# Altium PCB SensWear-V1R1-MainBoard.PcbDoc (part 1 of 3)
Units mm, origin at the board's own origin, x right, y up, seen from the top; angles counter-clockwise.
Board outline 50.5 x 8.5 mm, 4 copper layers (Top Layer, Layer 1, Layer 2, Bottom Layer), stack 0.148 mm thick; 73 components, 59 nets, 271 pads, 109 vias.
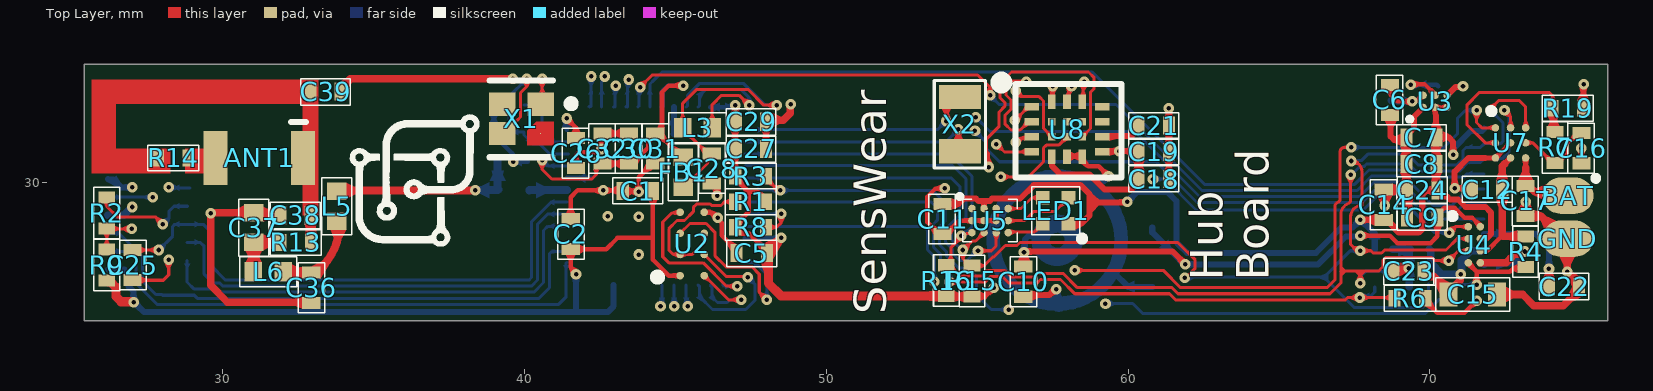
[diagram p0: Top Layer view]
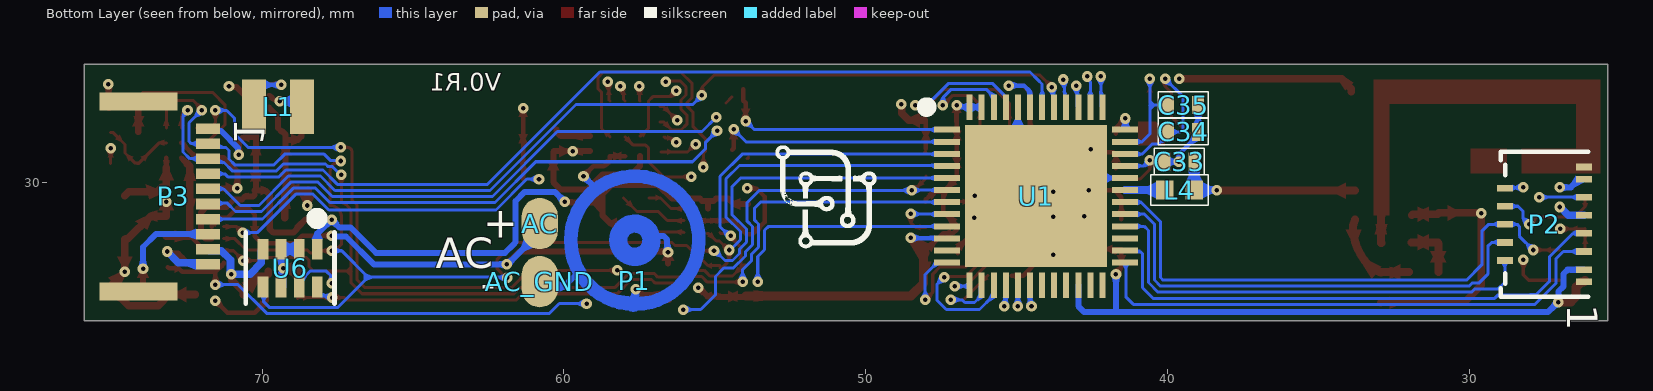
[diagram p1: Bottom Layer view, seen from below]
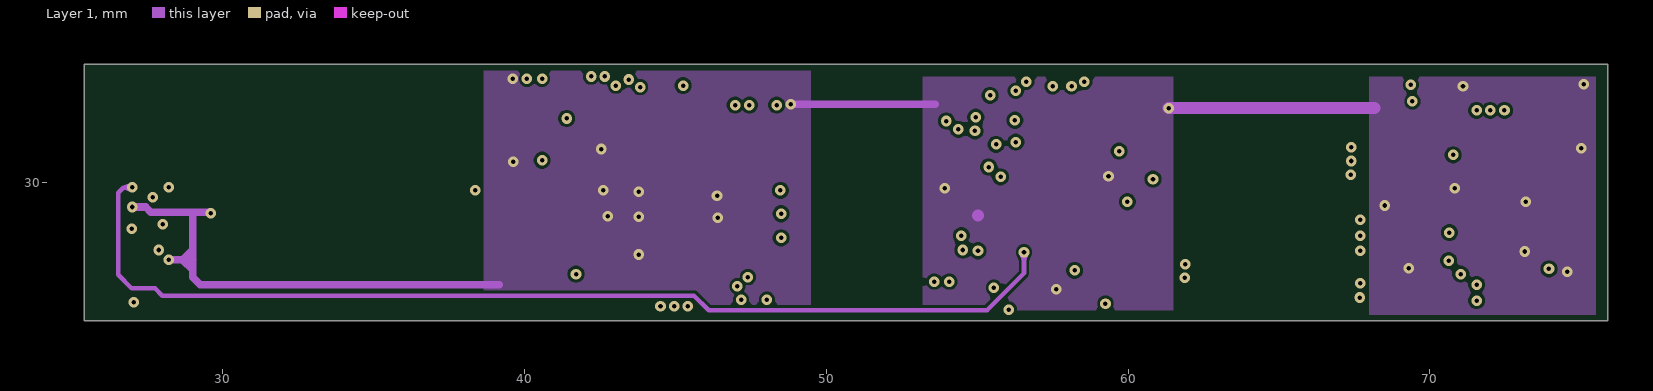
[diagram p2: Layer 1]
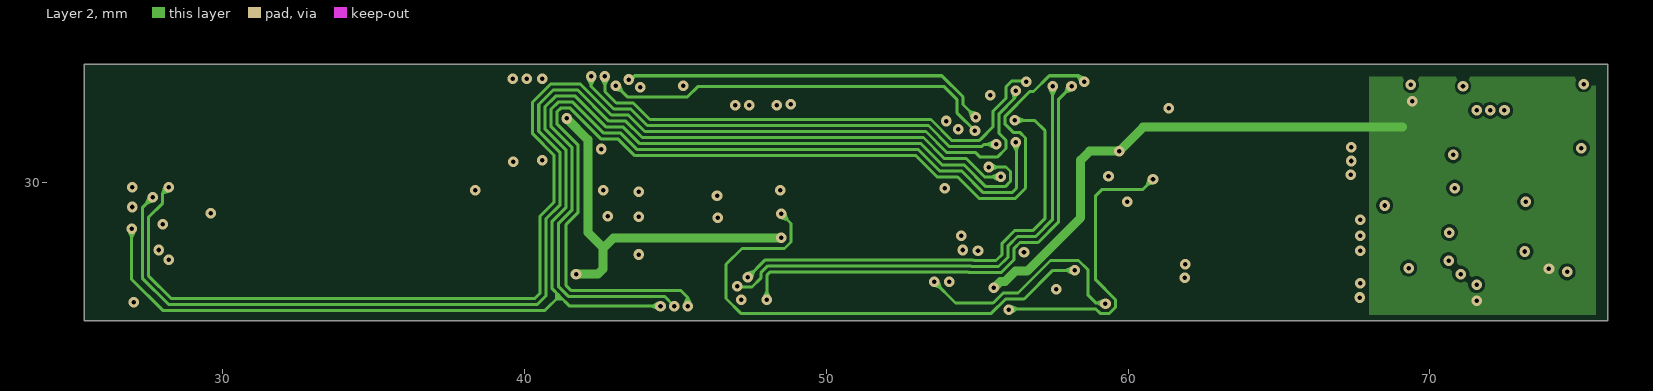
[diagram p3: Layer 2]
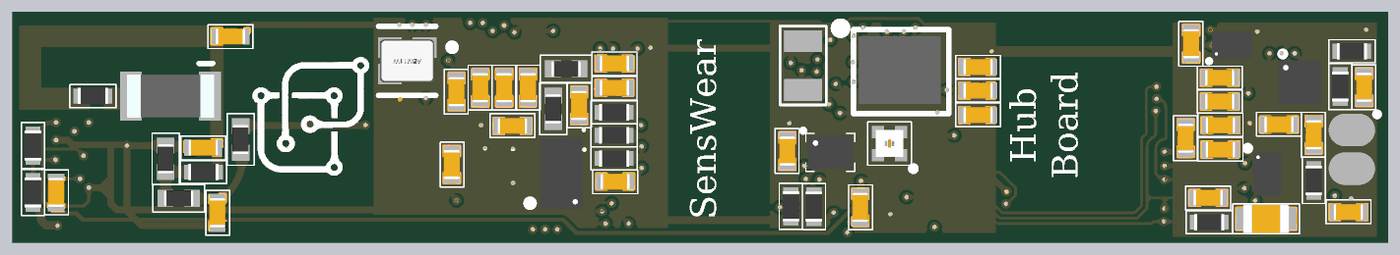
[diagram p5: 3D render of the assembled board from above, using the file's embedded part models]
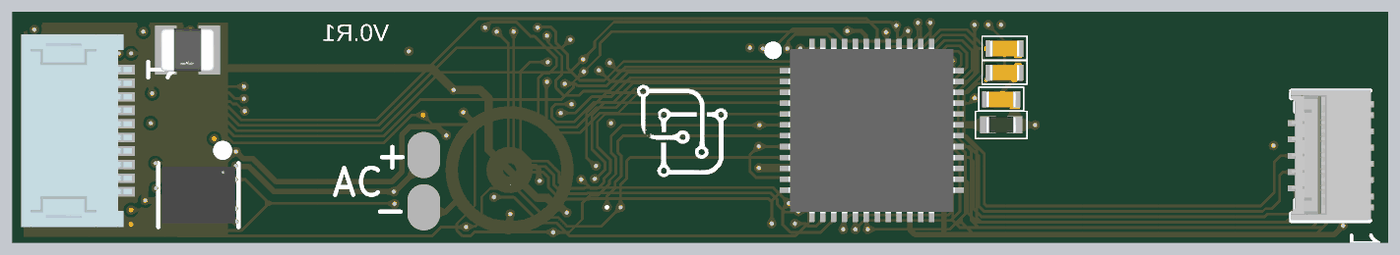
[diagram p6: 3D render of the assembled board from below, using the file's embedded part models]

## Layer stack, top to bottom
Top Solder: solder mask 0.0275, Solder Resist, Dk 2.9
Top Layer: signal copper 0.012
Dielectric 2: prepreg 0.0375, PP-006, Dk 3.3
Layer 1: signal copper 0.012
Dielectric 1: prepreg 0.025, FR-4, Dk 3.3
Layer 2: signal copper 0.012
Dielectric 3: prepreg 0.0375, PP-006, Dk 3.3
Bottom Layer: signal copper 0.012
Bottom Solder: solder mask 0.0275, Solder Resist, Dk 2.9

## Board outline
25.4,25.4 75.9,25.4 75.9,33.9 25.4,33.9

## Design rules (kind name [scope] priority, off if disabled: settings)
AcuteAngle [All] p1: minimum=7.50000000000000E+0001 checktracksonly=FALSE
BoardOutlineClearance [All] p1: gap=0.2 ignorepadtopadclearanceinfootprint=FALSE
Clearance PadToTrace [IsPad vs IsTrack] p1 off: gap=0.225 ignorepadtopadclearanceinfootprint=FALSE
Clearance Clearance_BGA [IsTrack vs IsBGA] p2: gap=0.2 ignorepadtopadclearanceinfootprint=FALSE
Clearance [All] p3: gap=0.1 ignorepadtopadclearanceinfootprint=FALSE
ComponentClearance [All] p1: gap=0.1 collisioncheckmode=3 verticalgap=0.1 showdistances=FALSE
MinimumSolderMaskSliver [All] p1: minsoldermaskwidth=0.12
PolygonConnect [All] p1: thpad.connectstyle=Relief thpad.reliefconductorwidth=0.254 thpad.reliefentries=4 thpad.polygonreliefangle="90 Angle" thpad.airgapwidth=0.254 smdpad.connectstyle=Relief smdpad.reliefconductorwidth=0.254 smdpad.reliefentries=4 smdpad.polygonreliefangle="90 Angle" smdpad.airgapwidth=0.254 via.connectstyle=Direct via.reliefconductorwidth=0.254 via.reliefentries=4 via.polygonreliefangle="90 Angle" via.airgapwidth=0.254
RoutingVias [All] p1: holewidth=0.15 width=0.35 viastyle="Through Hole" minholewidth=0.15 minwidth=0.35 maxholewidth=0.711 maxwidth=1.27
SilkToSilkClearance [All] p1: silktosilkclearance=0.1
SilkToSolderMaskClearance [IsPad] p1: minsilkscreentomaskgap=0.1 clearancetoexposedcopper=TRUE
SolderMaskExpansion [All] p1: expansion=0 istentingtop=FALSE
SupplyNets "Schematic Supply Nets_5" [InNet('CHG_AC')] p1: voltage=0.000
SupplyNets "Schematic Supply Nets_4" [InNet('V_SYS')] p2: voltage=0.000
SupplyNets "Schematic Supply Nets_3" [InNet('1V8')] p3: voltage=0.000
SupplyNets "Schematic Supply Nets_2" [InNet('GND')] p4: voltage=0.000
SupplyNets "Schematic Supply Nets_1" [InNet('V_BAT')] p5: voltage=0.000
SupplyNets "Schematic Supply Nets" [InNet('V_REG_IO')] p6: voltage=0.000
Width "Schematic Width Constraint_4" [InNet('NetL4_1')] p1: maxlimit=0.265 minlimit=0.254 preferedwidth=0.265 toplayer_minwidth=0.265 bottomlayer_minwidth=0.265 impedanceprofiledriven=TRUE impedanceprofileid={3FDAEDBA-452B-4B6D-846A-3BA16073400B} impedanceprofilevalue=50.000000 minimp=50.000000 maximp=50.000000 favimp=50.000000
Width "Schematic Width Constraint_3" [InNet('NetC33_1')] p2: maxlimit=0.265 minlimit=0.254 preferedwidth=0.265 toplayer_minwidth=0.265 bottomlayer_minwidth=0.265 impedanceprofiledriven=TRUE impedanceprofileid={3FDAEDBA-452B-4B6D-846A-3BA16073400B} impedanceprofilevalue=50.000000 minimp=50.000000 maximp=50.000000 favimp=50.000000
Width "Schematic Width Constraint_2" [InNet('NetC37_2')] p3: maxlimit=0.265 minlimit=0.254 preferedwidth=0.265 toplayer_minwidth=0.265 bottomlayer_minwidth=0.265 impedanceprofiledriven=TRUE impedanceprofileid={3FDAEDBA-452B-4B6D-846A-3BA16073400B} impedanceprofilevalue=50.000000 minimp=50.000000 maximp=50.000000 favimp=50.000000
Width "Schematic Width Constraint_1" [InNet('NetC36_2')] p4: maxlimit=0.265 minlimit=0.254 preferedwidth=0.265 toplayer_minwidth=0.265 bottomlayer_minwidth=0.265 impedanceprofiledriven=TRUE impedanceprofileid={3FDAEDBA-452B-4B6D-846A-3BA16073400B} impedanceprofilevalue=50.000000 minimp=50.000000 maximp=50.000000 favimp=50.000000
Width "Schematic Width Constraint" [InNet('NetANT1_1')] p5: maxlimit=0.265 minlimit=0.254 preferedwidth=0.265 toplayer_minwidth=0.265 bottomlayer_minwidth=0.265 impedanceprofiledriven=TRUE impedanceprofileid={3FDAEDBA-452B-4B6D-846A-3BA16073400B} impedanceprofilevalue=50.000000 minimp=50.000000 maximp=50.000000 favimp=50.000000
Width Width_50Ohm [IsTrack and HasParameter('Impedance') and HasParameterValue('Impedance', '50')] p6: maxlimit=0.254 minlimit=0.076 preferedwidth=0.254 toplayer_minwidth=0.254 midlayer1_maxwidth=0.076 midlayer1_prefwidth=0.076 midlayer2_maxwidth=0.076 midlayer2_prefwidth=0.076 bottomlayer_minwidth=0.254 minimp=50.000000 maximp=50.000000 favimp=50.000000 checkconnectedcopper=TRUE
Width [All] p7: maxlimit=1 minlimit=0.076 preferedwidth=0.1
26 further rules are at their usual default settings.

## Classes and differential pairs
component class U_Debug: P2 R2
net class "PWR Control": CHG_IRQ GAUGE_IRQ PWR_I2C_SCL PWR_I2C_SDA PWR_K\I\L\L\ V_REG_EN
component class U_RGB: C11 LED1 U5
component class U_Power: AC AC_GND BAT C6 C7 C8 C9 C10 C12 C14 C15 C16 C17 GND L1 P1 R3 R4 R6 R7 R8 R19 U3 U4 U6 U7
component class U_MPU: C18 C19 C21 R9 U8
component class U_Memory: C5 R1 U2
component class U_MCU: ANT1 C1 C2 C25 C26 C27 C28 C29 C30 C31 C32 C33 C34 C35 C36 C37 C38 C39 FB1 L3 L4 L5 L6 R13 R14 R15 R16 U1 X1 X2
component class U_DaughterBoard: C22 C23 C24 P3

## Components (designator, comment, footprint, x,y, rotation, side; value= is the part's Value field where it differs from the comment)
AC "TESTPAD" TEST_PAD 60.8,28.625 r90 bottom
AC_GND "TESTPAD" TEST_PAD 60.8,26.7 r90 bottom
ANT1 "2450AT18E0100E" ANTC3216X130N 31.2,30.8 r180 top
BAT "TESTPAD" TEST_PAD 74.575,29.55 r180 top
C1 "0.1 uF" CAPC1005X05N 43.752,29.701 r180 top
C2 "0.1 uF" CAPC1005X05N 41.527,28.276 r90 top
C5 "0.1 uF" CAPC1005X05N 47.525,27.65 r0 top
C6 "10uF" CAPC1005X05N 68.675,32.725 r270 top
C7 "4.7uF" CAPC1005X05N 69.725,31.475 r0 top
C8 "10uF" CAPC1005X05N 69.725,30.6 r180 top
C9 "0.1 uF" CAPC1005X05N 69.75,28.825 r180 top
C10 "4.7uF" CAPC1005X05N 56.525,26.7 r90 top
C11 "0.1 uF" CAPC1005X05N 53.85,28.775 r270 top
C12 "1 uF" CAPC1005X05N 71.9,29.75 r180 top
C14 "10uF" CAPC1005X05N 68.475,29.25 r270 top
C15 "47uF" CAPC1610X05N 71.425,26.275 r180 top
C16 "2.2 uF" CAPC1005X05N 75.025,31.125 r270 top
C17 "1 uF" CAPC1005X05N 73.175,29.375 r270 top
C18 "0.1 uF" CAPC1005X05N 60.85,30.1 r180 top
C19 "0.1 uF" CAPC1005X05N 60.85,31 r180 top
C21 "220nF" CAPC1005X05N 60.85,31.875 r0 top
C22 "4.7uF" CAPC1005X05N 74.45,26.525 r180 top
C23 "4.7uF" CAPC1005X05N 69.3,27.05 r0 top
C24 "4.7uF" CAPC1005X05N 69.75,29.725 r180 top
C25 "10 nF" CAPC1005X05N 27,27.25 r90 top
C26 "0.1 uF" CAPC1005X05N 41.702,30.961 r270 top
C27 "0.1 uF" CAPC1005X05N 47.502,31.101 r0 top
C28 "2.2 uF" CAPC1005X05N 46.202,30.451 r90 top
C29 "0.1 uF" CAPC1005X05N 47.502,32.001 r0 top
C30 "2.2 uF" CAPC1005X05N 43.452,31.111 r270 top
C31 "10 nF" CAPC1005X05N 44.327,31.111 r90 top
C32 "10 nF" CAPC1005X05N 42.577,31.111 r270 top
C33 "1.5 pF" CAPC1005X05N 39.602,30.676 r0 bottom
C34 "8pF" CAPC1005X05N 39.477,31.661 r0 bottom
C35 "8pF" CAPC1005X05N 39.477,32.551 r0 bottom
C36 "2 pF" CAPC1005X05N 32.925,26.5 r90 top
C37 "0.3pF" INDC1005X06N 31.025,28.49 r270 top
C38 "NC" CAPC1005X05N 32.4,28.9 r0 top
C39 "NC" CAPC1005X05N 33.4,33 r0 top
FB1 "BLM15AG121SN1D" INDC1005X06N 45.252,30.326 r270 top
GND "TESTPAD" TEST_PAD 74.575,28.125 r180 top
L1 "2.2 uH" FP-DFE201612C-MFG 69.475,32.5 r180 bottom
L3 "4.7uH" INDC1005X06N 45.727,31.801 r0 top
L4 "2.7 nH" INDC1005X06N 39.602,29.736 r180 bottom
L5 "3.5 nH" INDC1005X06N 33.775,29.2 r270 top
L6 "3.5 nH" INDC1005X06N 31.5,27.025 r180 top
LED1 "SML-LX0404SIUPGUSB" SML-LX0404SIUPGUSB 57.6,29.05 r270 top
P1 "RM-1238-B02-41" RM-1238-B02-41_2 57.65,28.1 r180 bottom
P2 "504754-1100" 5047541100__3 27.5,28.6 r90 bottom
P3 "51281-1098" 51281-1098__3 74.1,29.525 r270 bottom
R1 "1 M" RESC1005X04N 47.49,29.35 r0 top
R2 "1.5 k" RESC1005X04N 26.15,28.975 r90 top
R3 "1 M" RESC1005X04N 47.49,30.2 r0 top
R4 "100 k" RESC1005X04N 73.175,27.69 r90 top
R6 "1 M" RESC1005X04N 69.34,26.15 r180 top
R7 "1 M" RESC1005X04N 74.15,31.15 r270 top
R8 "1 M" RESC1005X04N 47.49,28.5 r0 top
R9 "1 M" RESC1005X04N 26.15,27.25 r90 top
R13 "0R0" RESC1005X04N 32.41,28 r0 top
R14 "0R0" RESC1005X04N 28.35,30.8 r0 top
R15 "1.5 k" RESC1005X04N 54.825,26.725 r90 top
R16 "1.5 k" RESC1005X04N 53.975,26.735 r90 top
R19 "10 k" RESC1005X04N 74.575,32.45 r0 top
U1 "NRF54L15-QF" QFN40P600X600X95-49N 44.352,29.536 r180 bottom
U2 "M95P32-IXCST/EF" BGA8C70P2X4_153X261X58 45.552,27.951 r180 top
U3 "TPS62840YBGR" BGA6C40P2X3_97X147X50 70.175,32.675 r90 top
U4 "BQ25180YBGR" BGA8C40P2X4_104X159X50 71.475,27.925 r0 top
U5 "LP5562TME" BGA12C40P4X3_162X122X68 55.425,28.725 r0 top
U6 "TPSM831021SIUR" MicroSiP8_SIU-A_TEX-M 69.075,27.147 r270 bottom
U7 "BQ27427YZFR" BGA9C50P3X3_158X162X62 72.675,31.3 r0 top
U8 "BHI360" BHI360 57.975,31.75 r0 top
X1 "32 MHz" FP-ABM11W-MFG 39.889,32.099 r180 top
X2 "32.768kHz" Abracon_ABS6_2012X06L 54.425,31.925 r90 top

## Footprints (in the part's own frame and the unit in brackets; to place one, negate y for a bottom-side part, rotate by r counter-clockwise, add the part's x,y. Pads: shape width x height; smd on the part's side, far side on the other; paste and mask are expansions set on the pad)
51281-1098__3 [mm]
  rect 0.6x2.6 smd: 0(-3.15,0) 0(3.15,0)
  rect 0.35x0.8 smd: 1(-2.25,2.3) 2(-1.75,2.3) 3(-1.25,2.3) 4(-0.75,2.3) 5(-0.25,2.3) 6(0.25,2.3) 7(0.75,2.3) 8(1.25,2.3) 9(1.75,2.3) 10(2.25,2.3)
  body extent -3.55,-1.48 3.55,2.57, height 1.17
5047541100__3 [mm]
  rect 0.22x0.54 smd: 1(-1.5,-1.31) 3(-0.9,-1.31) 5(-0.3,-1.31) 7(0.3,-1.31) 9(0.9,-1.31) 11(1.5,-1.31) P1(-1.9,-1.31) P2(1.9,-1.31)
  rect 0.22x0.53 smd: 2(-1.2,1.31) 4(-0.6,1.31) 6(0,1.31) 8(0.6,1.31) 10(1.2,1.31)
  silkscreen extent -2.4,-1.45 2.4,1.45, body extent -2.37,-1.53 2.43,1.48, height 1.46
Abracon_ABS6_2012X06L [mm] "Abracon ABS06 Series, 2-Leads, Body 2.0x1.2mm, IPC High Density"
  rect 0.8x1.4 smd: 1(-0.9,0) 2(0.9,0)
  silkscreen extent -1.45,-0.85 1.45,0.85, body extent -1.05,-0.65 1.05,0.65, height 0.6
ANTC3216X130N [mm]
  rect 0.8x1.8 smd: 1(-1.45,0) 2(1.45,0)
  silkscreen extent -1.55,-1.2 -1.05,-1.2, body extent -1.6,-0.8 1.6,0.8, height 1.3
BGA6C40P2X3_97X147X50 [mm] "BGA, 6-Leads, Body 0,97x1,47mmx0,50mm, Pitch 0,40mm"
  round 0.25 smd paste+0 mask+0: A1(-0.2,0.4) A2(0.2,0.4) B1(-0.2,0) B2(0.2,0) C1(-0.2,-0.4) C2(0.2,-0.4)
  silkscreen extent -0.64,0.79 -0.54,0.89, body extent -0.49,-0.73 0.49,0.73, height 0.5
BGA8C40P2X4_104X159X50 [mm] "BGA, 8-Leads, Body 1,04x1,59mmx0,50mm, Pitch 0,40mm"
  round 0.25 smd paste+0 mask+0: A1(-0.2,0.6) A2(0.2,0.6) B1(-0.2,0.2) B2(0.2,0.2) C1(-0.2,-0.2) C2(0.2,-0.2) D1(-0.2,-0.6) D2(0.2,-0.6)
  silkscreen extent -0.77,0.9 -0.67,1, body extent -0.52,-0.79 0.52,0.79, height 0.5
BGA8C70P2X4_153X261X58 [mm] "BGA, 8-Leads, Body 1.53x2.61mmx0.58mm, Pitch 0.70mm"
  round 0.25 smd mask+0.05: A1(-0.4,1.05) A2(0.4,1.05) B1(-0.4,0.35) B2(0.4,0.35) C1(-0.4,-0.35) C2(0.4,-0.35) D1(-0.4,-1.05) D2(0.4,-1.05)
  silkscreen extent 1.1,1.05 1.2,1.15, body extent -0.76,-1.31 0.76,1.31, height 0.58
BGA9C50P3X3_158X162X62 [mm] "BGA, 9-Leads, Body 1,58x1,62mmx0,63mm, Pitch 0,50mm"
  round 0.25 smd paste+0 mask+0: A1(-0.5,0.5) A2(0,0.5) A3(0.5,0.5) B1(-0.5,0) B2(0,0) B3(0.5,0) C1(-0.5,-0.5) C2(0,-0.5) C3(0.5,-0.5)
  silkscreen extent -0.68,1 -0.58,1.1, body extent -0.79,-0.81 0.79,0.81, height 0.63
BGA12C40P4X3_162X122X68 [mm] "BGA, 12-Leads, Body 1.62x1.22mmx0.68mm, Pitch 0.40mm"
  round 0.25 smd paste+0 mask+0: A1(-0.6,0.4) A2(-0.2,0.4) A3(0.2,0.4) A4(0.6,0.4) B1(-0.6,0) B2(-0.2,0) B3(0.2,0) B4(0.6,0) C1(-0.6,-0.4) C2(-0.2,-0.4) C3(0.2,-0.4) C4(0.6,-0.4)
  silkscreen extent -1.05,-0.7 0.9,0.85, body extent -0.81,-0.61 0.81,0.61, height 0.67
BHI360 [mm]
  rect 0.475x0.25 smd: 1(-1.163,0.75) 2(-1.163,0.25) 3(-1.163,-0.25) 4(-1.163,-0.75) 8(1.163,-0.75) 9(1.163,-0.25) 10(1.163,0.25) 11(1.163,0.75)
  rect 0.25x0.475 smd: 5(-0.5,-0.913) 6(0,-0.913) 7(0.5,-0.913) 12(0.5,0.912) 13(0,0.912) 14(-0.5,0.912)
  rect 0.25x0.25 smd: 15(-0.5,-0.25) 16(0,-0.25) 17(0.5,-0.25) 18(0.5,0.25) 19(0,0.25) 20(-0.5,0.25)
  silkscreen extent -2.29,-1.6 1.8,1.66, body extent -1.5,-1.25 1.5,1.25, height 0.94
CAPC1005X05N [mm] "Chip Capacitor, 2-Leads, Body 1.00x0.50mm, IPC Medium Density"
  rect 0.4x0.6 smd mask+0.04: 1(-0.5,0) 2(0.5,0)
  silkscreen extent -0.82,-0.45 0.82,0.43, body extent -0.55,-0.3 0.55,0.3, height 0.6
CAPC1610X05N [mm] "Chip Capacitor, 2-Leads, Body 1.60x1.00mm, IPC Medium Density"
  rect 0.6x0.8 smd mask+0.05: 1(-0.8,0) 2(0.8,0)
  silkscreen extent -1.22,-0.55 1.22,0.55, body extent -0.85,-0.52 0.85,0.53, height 1
FP-ABM11W-MFG [mm]
  rect 0.875x0.775 smd paste+0 mask+0: 1(-0.637,-0.487) 2(0.637,-0.487) 3(0.637,0.487)
  round 0.025 smd paste+0 mask+0: 4(-0.637,0.487)
  silkscreen extent -1.78,-1.28 1.05,1.28, body extent -1,-0.8 1,0.8, height 0.5
FP-DFE201612C-MFG [mm]
  rect 0.8x1.8 smd paste+0 mask+0: 1(-0.8,0) 2(0.8,0)
  body extent -1,-0.8 1,0.8, height 1.2
INDC1005X06N [mm] "Chip Inductor, 2-Leads, Body 1.00x0.50mm, IPC Medium Density"
  rect 0.58x0.64 smd: 1(-0.49,0) 2(0.49,0)
  silkscreen extent -0.95,-0.5 0.95,0.5, body extent -0.55,-0.3 0.55,0.3, height 0.6
MicroSiP8_SIU-A_TEX-M [mm]
  rect 0.684x0.355 smd paste+0 mask+0: 1(-0.622,0.9) 2(-0.622,0.3) 3(-0.622,-0.3) 4(-0.622,-0.9) 5(0.622,-0.9) 6(0.622,-0.3) 7(0.622,0.3) 8(0.622,0.9)
  silkscreen extent -1.75,-1.47 1.18,1.47, body extent -1.05,-1.35 1.05,1.35, height 1.2
QFN40P600X600X95-49N [mm]
  rect 0.85x0.2 smd: 1(-2.95,2.2) 2(-2.95,1.8) 3(-2.95,1.4) 4(-2.95,1) 5(-2.95,0.6) 6(-2.95,0.2) 7(-2.95,-0.2) 8(-2.95,-0.6) 9(-2.95,-1) 10(-2.95,-1.4) 11(-2.95,-1.8) 12(-2.95,-2.2) 25(2.95,-2.2) 26(2.95,-1.8) 27(2.95,-1.4) 28(2.95,-1) 29(2.95,-0.6) 30(2.95,-0.2) 31(2.95,0.2) 32(2.95,0.6) 33(2.95,1) 34(2.95,1.4) 35(2.95,1.8) 36(2.95,2.2)
  rect 0.2x0.85 smd: 13(-2.2,-2.95) 14(-1.8,-2.95) 15(-1.4,-2.95) 16(-1,-2.95) 17(-0.6,-2.95) 18(-0.2,-2.95) 19(0.2,-2.95) 20(0.6,-2.95) 21(1,-2.95) 22(1.4,-2.95) 23(1.8,-2.95) 24(2.2,-2.95) 37(2.2,2.95) 38(1.8,2.95) 39(1.4,2.95) 40(1,2.95) 41(0.6,2.95) 42(0.2,2.95) 43(-0.2,2.95) 44(-0.6,2.95) 45(-1,2.95) 46(-1.4,2.95) 47(-1.8,2.95) 48(-2.2,2.95)
  rect 4.7x4.7 smd paste-400: 49(0,0)
  silkscreen extent -3.75,2.83 -3.5,3.07, body extent -3.05,-3.05 3.05,3.05, height 0.95
RESC1005X04N [mm] "Chip Resistor, 2-Leads, Body 1.00x0.50mm, IPC Medium Density"
  rect 0.4x0.55 smd: 1(-0.51,0) 2(0.51,0)
  silkscreen extent -0.85,-0.43 0.85,0.43, body extent -0.55,-0.3 0.55,0.3, height 0.6
RM-1238-B02-41_2 [mm]
  round 0.025 smd: 1(0.025,-0.575) 2(-0.05,-2.15)
  Top Layer lines w0.45: 0.025,-2.15 ccw(c0,-0.025) -0.875,1.911 ccw(c0,-0.025) -1.317,1.643 ccw(c0,-0.025) -1.725,1.216 ccw(c0,-0.025) -1.775,1.143 ccw(c0,-0.025) -2.125,-0.025 ccw(c0,-0.025) -0.025,-2.15 ccw(c0,-0.025) 0,-2.15 ccw(c0,-0.025) 0.025,-2.15
  Top Layer lines w0.6: 0.05,-0.573 cw(c0,-0.025) -0.55,-0.025 cw(c0,-0.025) 0.05,-0.573
  body extent -2.25,-2.28 2.25,2.22, height 1.5
SML-LX0404SIUPGUSB [mm]
  rect 0.45x0.45 smd: 1(0.425,0.425) 2(0.425,-0.425) 3(-0.425,-0.425) 4(-0.425,0.425)
  silkscreen extent -0.8,-0.8 0.97,0.93, body extent -0.5,-0.5 0.5,0.5, height 0.26
TEST_PAD [mm] "TRST PAD with no connection"
  oval 1.7x1.2 smd mask+0: 1(0,0)
  body extent -0.9,-0.65 0.9,0.65, height 1

## Part data
AC AC_GND BAT GND: "TESTPOINT PIN SMD", Color=-, Category="Test and Measurement", Mounting Type="Surface Mount", Type="PC Test Point"
ANT1: "7 Inch Reel / Mini 2.45Ghz Chip Antenna", Manufacturer=Johanson, Supplier Part Number=609-2450AT18E0100E, Category="RF Antennas", Checked=TRUE, ComponentLink1Description=https://datasheet.ciiva.com/24048/antenna-2450at18e0100-253355-24048542.pdf?src-supplier=Mouser, ComponentLink1URL=https://datasheet.ciiva.com/24048/antenna-2450at18e0100-253355-24048542.pdf?src-supplier=Mouser, Manufacturer Part Number=2450AT18E0100E, Pricing="1=0.69, 10=0.624, 50=0.624, 100=0.479, 1000=0.303, 10000=0.245 (USD)", RoHS=Yes, Stock=4431, Supplier=Mouser, Supplier 1=Mouser, Supplier Part Number 1=609-2450AT18E0100E
C1 C2 C5 C9 C11 C18 C19 C26 C27 C29: library part GRM155R61C104KA88D, "CAP CER 0.1UF 16V X5R 0402", Capacitance - nF="100 nF", Capacitance - pF="100000 pF", Case Code - in=0402, Case Code - mm=1005, Dielectric=X5R, Manufacturer="Murata Electronics", Maximum Operating Temperature="+ 85 C", Minimum Operating Temperature="- 55 C", Package / Case="0402 (1005 metric)", Supplier Part Number 1=81-GRM155R61C104KA8D, Tolerance="10 %", Voltage Rating DC="16 VDC", Brand="Murata Electronics", Capacitance="0.1 uF", Category="Multilayer Ceramic Capacitors MLCC - SMD/SMT", ComponentLink1Description=http://www.mouser.com/datasheet/2/281/murata_03052018_GRM_Series_1-1310166.pdf, ComponentLink1URL=http://www.mouser.com/datasheet/2/281/murata_03052018_GRM_Series_1-1310166.pdf, Height="0.5 mm", Length="1 mm", Manufacturer Part Number=GRM155R61C104KA88D, Minimum Order Quantity=1, Packaging="Cut Tape", Pricing="1=0.082, 10=0.026, 100=0.011, 500=0.008, 1000=0.007, 2500=0.006, 5000=0.005, 10000=0.004 (EUR)", Product="General Type MLCCs", Reeling=True, RoHS="RoHS Compliant", RoHS - Mouser=Y, Series=GRM, Standard Pack Qty=10000, Stock=0, Supplier 1=Mouser, Supplier 2=Digikey, Supplier 3=Digikey, Supplier Part Number 2=490-5415-1-ND, Supplier Part Number 3=490-5415-6-ND, Termination=Standard, Termination Style=SMD/SMT, Type="Chip Multilayer Ceramic Capacitor for General Purpose", Width="0.5 mm"
C6 C8 C14: library part CL05A106MP5NUNC, "Multilayer Ceramic Capacitor, 10 uF, 10 V, ± 20%, X5R, 0402 [1005 Metric]", Case Code (Imperial)=0402, Case Code (Metric)=1005, Dielectric=X5R, Manufacturer=Samsung, Max Operating Temperature=85°C, Min Operating Temperature=-55°C, Package Quantity=1, Supplier Part Number 1=187-CL05A106MP5NUNC, Tolerance=20%, Voltage Rating=10V, Case/Package=0402, Category="Ceramic Capacitors", ComponentLink1Description=https://datasheet.ciiva.com/25721/cl05a106mp5nunc-25721584.pdf?src-supplier=Digi-Key, ComponentLink1URL=https://datasheet.ciiva.com/25721/cl05a106mp5nunc-25721584.pdf?src-supplier=Digi-Key, ComponentLink2Description=https://datasheet.ciiva.com/26838/getdatasheetpartid-745310-26838170.pdf?src-supplier=Verical, ComponentLink2URL=https://datasheet.ciiva.com/26838/getdatasheetpartid-745310-26838170.pdf?src-supplier=Verical, Depth=0.5mm, Lead Free="Lead Free", Length=1mm, Manufacturer Part Number=CL05A106MP5NUNC, Mounting Technology="Surface Mount", Packaging="Tape and Reel", Pricing="1=0,1584, 10=0,0737, 25=0,073, 100=0,0424, 250=0,042, 500=0,0416, 1000=0,0375 (USD)", Radiation Hardening=No, RoHS=Yes, RoHS Compliant=Yes, Series=CL, Stock=275, Supplier="Arrow Electronics", Supplier 1=Mouser, Supplier 2=Digikey, Supplier Part Number=CL05A106MP5NUNC, Supplier Part Number 2=1276-1450-1-ND, Thickness=0.028inch, Width=0.02inch
C7 C10 C22 C23 C24: library part GRM155R61A475MEAAD, "Multilayer Ceramic Capacitor, 4.7 uF, 10 V, ± 20%, X5R, 0402 [1005 Metric]", Case Code (Imperial)=0402, Case Code (Metric)=1005, Dielectric=1537DielectricType, Manufacturer=Murata, Max Operating Temperature=85°C, Min Operating Temperature=-55°C, Supplier Part Number 1=81-GRM155R61A475MEAD, Tolerance=20%, Voltage Rating=10V, Case/Package=0402, Category="Ceramic Capacitors", ComponentLink1Description=http://www.farnell.com/datasheets/2189109.pdf?src-supplier=Farnell, ComponentLink1URL=http://www.farnell.com/datasheets/2189109.pdf?src-supplier=Farnell, ComponentLink2Description=http://www.farnell.com/datasheets/2189109.pdf?src-supplier=Newark, ComponentLink2URL=http://www.farnell.com/datasheets/2189109.pdf?src-supplier=Newark, ComponentLink3Description=http://www.farnell.com/datasheets/2189109.pdf?src-supplier=Element14, ComponentLink3URL=http://www.farnell.com/datasheets/2189109.pdf?src-supplier=Element14, ComponentLink4Description=http://datasheet.octopart.com/GRM155R61A475MEAAD-Murata-datasheet-68589269.pdf?src-supplier=Distrelec, ComponentLink4URL=http://datasheet.octopart.com/GRM155R61A475MEAAD-Murata-datasheet-68589269.pdf?src-supplier=Distrelec, ComponentLink5Description=http://datasheet.octopart.com/GRM155R61A475MEAAD-Murata-datasheet-68589269.pdf?src-supplier=Farnell, ComponentLink5URL=http://datasheet.octopart.com/GRM155R61A475MEAAD-Murata-datasheet-68589269.pdf?src-supplier=Farnell, ComponentLink6Description=https://search.murata.co.jp/Ceramy/image/img/A01X/G101/ENG/GRM155R61A475MEAA-01.pdf?src-supplier=Digi-Key, ComponentLink6URL=https://search.murata.co.jp/Ceramy/image/img/A01X/G101/ENG/GRM155R61A475MEAA-01.pdf?src-supplier=Digi-Key, ComponentLink7Description=http://datasheet.octopart.com/GRM155R61A475MEAAD-Murata-datasheet-68589269.pdf?src-supplier=Future+Electronics, ComponentLink7URL=http://datasheet.octopart.com/GRM155R61A475MEAAD-Murata-datasheet-68589269.pdf?src-supplier=Future+Electronics, ComponentLink8Description=https://datasheet.octopart.com/GRM155R61A475MEAAD-Murata-datasheet-68589269.pdf?src-supplier=Newark, ComponentLink8URL=https://datasheet.octopart.com/GRM155R61A475MEAAD-Murata-datasheet-68589269.pdf?src-supplier=Newark, ComponentLink9Description=http://datasheet.octopart.com/GRM155R61A475MEAAD-Murata-datasheet-68589269.pdf?src-supplier=Verical, ComponentLink9URL=http://datasheet.octopart.com/GRM155R61A475MEAAD-Murata-datasheet-68589269.pdf?src-supplier=Verical, ComponentLink10Description=https://datasheet.octopart.com/GRM155R61A475MEAAD-Murata-datasheet-165579666.pdf?src-supplier=TME, ComponentLink10URL=https://datasheet.octopart.com/GRM155R61A475MEAAD-Murata-datasheet-165579666.pdf?src-supplier=TME, ComponentLink11Description=http://datasheet.octopart.com/GRM155R61A475MEAAD-Murata-datasheet-68589269.pdf?src-supplier=Quest, ComponentLink11URL=http://datasheet.octopart.com/GRM155R61A475MEAAD-Murata-datasheet-68589269.pdf?src-supplier=Quest, ComponentLink12Description=http://datasheet.octopart.com/GRM155R61A475MEAAD-Murata-datasheet-68589269.pdf?src-supplier=TTI, ComponentLink12URL=http://datasheet.octopart.com/GRM155R61A475MEAAD-Murata-datasheet-68589269.pdf?src-supplier=TTI, ComponentLink13Description=http://datasheet.octopart.com/GRM155R61A475MEAAD-Murata-datasheet-68589269.pdf?src-supplier=NAC+Semi, ComponentLink13URL=http://datasheet.octopart.com/GRM155R61A475MEAAD-Murata-datasheet-68589269.pdf?src-supplier=NAC+Semi, Height=650um, Length=1mm, Manufacturer Part Number=GRM155R61A475MEAAD, Material=4241ConductorMaterial, Mounting Technology="Surface Mount", Packaging="Tape and Reel", Pricing="10000=0,0187, 50000=0,0159, 100000=0,0132 (USD)", RoHS=Yes, RoHS Compliant=Yes, Series=GRM, Stock=930000, Supplier 1=Mouser, Supplier 2=Farnell, Supplier Part Number 2=3581674, Thickness=500um, Voltage Rating (DC)=10V, Width=500um
C12 C17: library part GRM155R61A105KE15D, "CAP CER 1UF 10V X5R 0402", Capacitance=1µF, Manufacturer="Murata Electronics North America", Operating Temperature="-55°C ~ 85°C", Package / Case="0402 (1005 Metric)", Ratings=-, Supplier Part Number 1=490-3890-6-ND, Temperature Coefficient=X5R, Tolerance=±10%, Voltage - Rated=10V, Applications="General Purpose", Category=Capacitors, ComponentLink1Description=http://www.murata.com/~/media/webrenewal/support/library/catalog/products/capacitor/mlcc/c02e.ashx, ComponentLink1URL=http://www.murata.com/~/media/webrenewal/support/library/catalog/products/capacitor/mlcc/c02e.ashx, Features=-, Height - Seated (Max)=-, Lead Spacing=-, Lead Style=-, Manufacturer Part Number=GRM155R61A105KE15D, Mounting Type="Surface Mount, MLCC", Packaging=Digi-Reel®, Part Status=Active, Pricing 1="1=0.1, 10=0.024, 50=0.013, 100=0.011, 250=0.009, 500=0.0077, 1000=0.006, 5000=0.005 (USD)", RoHS="RoHS Compliant", Size / Dimension="0.039\" L x 0.020\" W (1.00mm x 0.50mm)", Stock 1=5520111, Supplier 1=Digi-Key, Thickness (Max)="0.022\" (0.55mm)"
C15: library part CL10A476MQ8QRNC, "CL10 Series 0603 47 uF 6.3 V ±20% Tolerance X5R Multilayer Ceramic Capacitor", Case/Package=345Case, Manufacturer=Samsung, Max Operating Temperature=85°C, Min Operating Temperature=-55°C, Supplier Part Number=1276-CL10A476MQ8QRNCCT-ND, Tolerance=20%, Category="Ceramic Capacitors", ComponentLink1Description=https://datasheet.octopart.com/CL10A476MQ8QRNC-Samsung-Electro-Mechanics-datasheet-68300278.pdf?src-supplier=Future+Electronics, ComponentLink1URL=https://datasheet.octopart.com/CL10A476MQ8QRNC-Samsung-Electro-Mechanics-datasheet-68300278.pdf?src-supplier=Future+Electronics, Lead Free=5697LeadFree, Manufacturer Part Number=CL10A476MQ8QRNC, Pricing="1=1.04, 10=0.669, 100=0.477, 1000=0.37689 (USD)", RoHS=Yes, RoHS Compliant=5897YesNo, Stock=103327, Supplier=Digikey, Supplier 1=Digikey, Supplier 2=Digikey, Supplier Part Number 1=1276-CL10A476MQ8QRNCCT-ND, Supplier Part Number 2=1276-CL10A476MQ8QRNCDKR-ND
C16 C28 C30: library part GRM155R61A225KE95D, "CAP CER 2.2UF 10V X5R 0402", Capacitance=2.2µF, Manufacturer="Murata Electronics North America", Operating Temperature="-55°C ~ 85°C", Package / Case="0402 (1005 Metric)", Ratings=-, Supplier Part Number 1=490-10451-6-ND, Temperature Coefficient=X5R, Tolerance=±10%, Voltage - Rated=10V, Applications="General Purpose", Category=Capacitors, ComponentLink1Description=http://www.murata.com/~/media/webrenewal/support/library/catalog/products/capacitor/mlcc/c02e.ashx, ComponentLink1URL=http://www.murata.com/~/media/webrenewal/support/library/catalog/products/capacitor/mlcc/c02e.ashx, Features="Derating Recommended", Height - Seated (Max)=-, Lead Spacing=-, Lead Style=-, Manufacturer Part Number=GRM155R61A225KE95D, Mounting Type="Surface Mount, MLCC", Packaging=Digi-Reel®, Part Status=Active, Pricing 1="1=0.1, 10=0.06, 50=0.0326, 100=0.0275, 250=0.02252, 500=0.01926, 1000=0.015, 5000=0.0125 (USD)", RoHS="RoHS Compliant", Size / Dimension="0.039\" L x 0.020\" W (1.00mm x 0.50mm)", Stock 1=370562, Supplier 1=Digi-Key, Thickness (Max)="0.022\" (0.55mm)"
C21: library part GRM155R61C224KA12D, "CAP CER 0.22UF 16V X5R 0402", Manufacturer=Murata, Supplier Part Number=81-GRM155R61C224KA2D, Category="Ceramic Capacitors", ComponentLink1Description=http://www.mouser.com/ds/2/281/c02e-2905.pdf?src-supplier=Mouser, ComponentLink1URL=http://www.mouser.com/ds/2/281/c02e-2905.pdf?src-supplier=Mouser, ComponentLink2Description=https://www.murata.com/~/media/webrenewal/support/library/catalog/products/capacitor/mlcc/c02e.ashx?la=en-us&src-supplier=Digikey, ComponentLink2URL=https://www.murata.com/~/media/webrenewal/support/library/catalog/products/capacitor/mlcc/c02e.ashx?la=en-us&src-supplier=Digikey, ComponentLink3Description=http://search.murata.co.jp/Ceramy/image/img/A01X/G101/ENG/GRM155R61C224KA12-01.pdf?src-supplier=Digikey, ComponentLink3URL=http://search.murata.co.jp/Ceramy/image/img/A01X/G101/ENG/GRM155R61C224KA12-01.pdf?src-supplier=Digikey, ComponentLink4Description=http://search.murata.co.jp/Ceramy/image/img/A01X/partnumbering_e_01.pdf?src-supplier=Digikey, ComponentLink4URL=http://search.murata.co.jp/Ceramy/image/img/A01X/partnumbering_e_01.pdf?src-supplier=Digikey, ComponentLink5Description=https://datasheet.octopart.com/GRM155R61C224KA12D-Murata-datasheet-22122223.pdf?src-supplier=Future+Electronics, ComponentLink5URL=https://datasheet.octopart.com/GRM155R61C224KA12D-Murata-datasheet-22122223.pdf?src-supplier=Future+Electronics, Lead Free=5697LeadFree, Manufacturer Part Number=GRM155R61C224KA12D, Pricing="1=0.1, 10=0.043, 50=0.043, 100=0.026, 1000=0.017, 10000=0.009 (USD)", RoHS=Yes, Stock=8589, Supplier=Mouser, Supplier 1=Mouser, Supplier 2=Digikey, Supplier Part Number 1=81-GRM155R61C224KA2D, Supplier Part Number 2=490-11416-1-ND
C25 C31 C32: library part GRM155R71H103KA88D, "CAP CER 10000PF 50V X7R 0402", Capacitance=10000pF, Manufacturer="Murata Electronics North America", Operating Temperature="-55°C ~ 125°C", Package / Case="0402 (1005 Metric)", Ratings=-, Supplier Part Number 1=490-4516-6-ND, Temperature Coefficient=X7R, Tolerance=±10%, Voltage - Rated=50V, Applications="General Purpose", Category=Capacitors, ComponentLink1Description=http://www.murata.com/~/media/webrenewal/support/library/catalog/products/capacitor/mlcc/c02e.pdf, ComponentLink1URL=http://www.murata.com/~/media/webrenewal/support/library/catalog/products/capacitor/mlcc/c02e.pdf, Features=-, Height - Seated (Max)=-, Lead Spacing=-, Lead Style=-, Manufacturer Part Number=GRM155R71H103KA88D, Mounting Type="Surface Mount, MLCC", Packaging=Digi-Reel®, Part Status=Active, Pricing 1="1=0.11, 50=0.0056, 100=0.0047, 250=0.00384, 500=0.0033, 1000=0.00256, 5000=0.00213 (GBP)", RoHS="RoHS Compliant", Size / Dimension="0.039\" L x 0.020\" W (1.00mm x 0.50mm)", Stock 1=7217649, Supplier 1=Digi-Key, Thickness (Max)="0.022\" (0.55mm)"
C33: library part GJM1555C1H1R5BB01D, "Multilayer Ceramic Capacitor, 1.5 pF, 50 V, ï¿½ 0.1pF, C0G (NP0), 0402 [1005 Metric]", Manufacturer=Murata, Supplier Part Number=81-GJM1555C1H1R5BB1D, Category="Ceramic Capacitors", ComponentLink1Description=https://datasheet.ciiva.com/8030/1700191-8030107.pdf?src-supplier=Element14, ComponentLink1URL=https://datasheet.ciiva.com/8030/1700191-8030107.pdf?src-supplier=Element14, ComponentLink2Description=https://datasheet.ciiva.com/26843/getdatasheetpartid-698463-26843693.pdf?src-supplier=Verical, ComponentLink2URL=https://datasheet.ciiva.com/26843/getdatasheetpartid-698463-26843693.pdf?src-supplier=Verical, ComponentLink3Description=https://datasheet.ciiva.com/29542/partnumbering-e-01-29542725.pdf?src-supplier=Digikey, ComponentLink3URL=https://datasheet.ciiva.com/29542/partnumbering-e-01-29542725.pdf?src-supplier=Digikey, ComponentLink4Description=https://datasheet.ciiva.com/29542/partnumbering-e-01-29542726.pdf?src-supplier=Digikey, ComponentLink4URL=https://datasheet.ciiva.com/29542/partnumbering-e-01-29542726.pdf?src-supplier=Digikey, ComponentLink5Description=https://datasheet.ciiva.com/16440/l0005e-16440473.pdf?src-supplier=Future+Electronics, ComponentLink5URL=https://datasheet.ciiva.com/16440/l0005e-16440473.pdf?src-supplier=Future+Electronics, Lead Free=5697LeadFree, Manufacturer Part Number=GJM1555C1H1R5BB01D, Material=4241ConductorMaterial, Pricing="1=0.1, 10=0.05, 50=0.05, 100=0.03, 1000=0.022, 10000=0.011 (USD)", RoHS=Yes, Stock=9670, Supplier=Mouser, Supplier 1=Mouser, Supplier 2=Digikey, Supplier 3=Digikey, Supplier Part Number 1=81-GJM1555C1H1R5BB1D, Supplier Part Number 2=490-8087-1-ND, Supplier Part Number 3=490-8087-6-ND
C34 C35: library part GRM1555C1H8R0BA01D, "Multilayer Ceramic Capacitors MLCC - SMD/SMT 0402 8.0pF 50volts C0G +/-0.05pF", Case Code (Imperial)=0402, Case Code (Metric)=1005, Dielectric=C0G, Manufacturer=Murata, Max Operating Temperature=125°C, Min Operating Temperature=-55°C, Package Quantity=1, Supplier Part Number=490-8230-1-ND, Supplier Part Number 1=81-GRM1555C1H8R0BA1D, Voltage Rating=50V, Case/Package=0402, Category="Ceramic Capacitors", ComponentLink1Description=https://datasheet.ciiva.com/18184/getdatasheetpartid-319021-18184500.pdf?src-supplier=Verical, ComponentLink1URL=https://datasheet.ciiva.com/18184/getdatasheetpartid-319021-18184500.pdf?src-supplier=Verical, ComponentLink2Description=https://datasheet.ciiva.com/6263/grm1555c1h820ga01-01-6263780.pdf?src-supplier=Digi-Key, ComponentLink2URL=https://datasheet.ciiva.com/6263/grm1555c1h820ga01-01-6263780.pdf?src-supplier=Digi-Key, ComponentLink3Description=https://datasheet.ciiva.com/5432/product-5432205.pdf?src-supplier=Mouser, ComponentLink3URL=https://datasheet.ciiva.com/5432/product-5432205.pdf?src-supplier=Mouser, ComponentLink4Description=https://datasheet.ciiva.com/11610/product-11610151.pdf?src-supplier=Avnet, ComponentLink4URL=https://datasheet.ciiva.com/11610/product-11610151.pdf?src-supplier=Avnet, ComponentLink5Description=https://datasheet.ciiva.com/16495/c02e-16495287.pdf?src-supplier=Future+Electronics, ComponentLink5URL=https://datasheet.ciiva.com/16495/c02e-16495287.pdf?src-supplier=Future+Electronics, ComponentLink6Description=https://datasheet.ciiva.com/5442/product-5442458.pdf?src-supplier=Mouser, ComponentLink6URL=https://datasheet.ciiva.com/5442/product-5442458.pdf?src-supplier=Mouser, Construction=Flat, Depth=0.5mm, Height=0.5mm, Lead Free="Lead Free", Length=1mm, Manufacturer Part Number=GRM1555C1H8R0BA01D, Mounting Technology="Surface Mount", Packaging="Tape and Reel", Pricing="1=0,1, 10=0,051, 50=0,0278, 100=0,0227, 500=0,01624, 1000=0,01276, 2500=0,0116, 5000=0,01067 (USD)", Radiation Hardening=No, RoHS=Yes, RoHS Compliant=Yes, Series=GRM, Stock=671988, Supplier=Digi-Key, Supplier 1=Mouser, Supplier 2=Digikey, Supplier 3=Digikey, Supplier Part Number 2=490-8230-1-ND, Supplier Part Number 3=490-8230-6-ND, Termination=SMD/SMT, Thickness=0.022inch, Voltage Rating (DC)=50V, Width=0.02inch
C36: library part GJM1555C1H2R0WB01D, "0402 2 pF 50V ±0.05 pF Tolerance C0G SMT Multilayer Ceramic Capacitor", Manufacturer=Murata, Supplier Part Number=81-GJM1555C1H2R0WB1D, Temperature Coefficient=30ppm/°C, Category="Ceramic Capacitors", ComponentLink1Description=https://datasheet.ciiva.com/26843/getdatasheetpartid-724043-26843695.pdf?src-supplier=Verical, ComponentLink1URL=https://datasheet.ciiva.com/26843/getdatasheetpartid-724043-26843695.pdf?src-supplier=Verical, Lead Free=5697LeadFree, Manufacturer Part Number=GJM1555C1H2R0WB01D, Material=4241ConductorMaterial, Pricing="1=0.14, 10=0.077, 50=0.077, 100=0.047, 1000=0.032, 10000=0.019 (USD)", RoHS=Yes, Stock=97187, Supplier=Mouser, Supplier 1=Mouser, Supplier 2=Digikey, Supplier 3=Digikey, Supplier Part Number 1=81-GJM1555C1H2R0WB1D, Supplier Part Number 2=490-11205-1-ND, Supplier Part Number 3=490-11205-6-ND
C37: library part GJM1555C1HR30WB01D, "0402 0.3 pF 50V ±0.05 pF Tolerance C0G SMT Multilayer Ceramic Capacitor", Case Code (Imperial)=0402, Case Code (Metric)=1005, Dielectric=C0G, Manufacturer=Murata, Max Operating Temperature=125°C, Min Operating Temperature=-55°C, Package Quantity=10000, Supplier Part Number=81-GJM1555C1HR30WB1D, Temperature Coefficient=30ppm/°C, Voltage Rating=50V, Case/Package=0402, Category="Ceramic Capacitors", ComponentLink1Description=https://datasheet.ciiva.com/11617/product-11617574.pdf?src-supplier=Avnet, ComponentLink1URL=https://datasheet.ciiva.com/11617/product-11617574.pdf?src-supplier=Avnet, ComponentLink2Description=https://datasheet.ciiva.com/169/partnumbering-e-01-169995.pdf?src-supplier=Digikey, ComponentLink2URL=https://datasheet.ciiva.com/169/partnumbering-e-01-169995.pdf?src-supplier=Digikey, Construction=Flat, Depth=0.5mm, Height=0.5mm, Lead Free="Lead Free", Length=1mm, Manufacturer Part Number=GJM1555C1HR30WB01D, Material=4241ConductorMaterial, Mounting Technology="Surface Mount", Packaging="Tape and Reel", Pricing="1=0.14, 10=0.077, 50=0.077, 100=0.047, 1000=0.031, 10000=0.021 (USD)", Radiation Hardening=No, RoHS=Yes, RoHS Compliant=Yes, Series=GJM, Stock=24305, Supplier=Mouser, Supplier 1=Mouser, Supplier 2=Digikey, Supplier 3=Digikey, Supplier Part Number 1=81-GJM1555C1HR30WB1D, Supplier Part Number 2=490-11248-1-ND, Supplier Part Number 3=490-11248-6-ND, Termination=SMD/SMT, Thickness=0.022inch, Voltage Rating (DC)=50V, Width=0.02inch
C38 C39: library part CAPACITOR
FB1: "Ferrite Beads Multi-Layer 120Ohm 25% 100MHz 550mA 190mOhm DCR 0402 Paper T/R", Case Code (Imperial)=0402, Case Code (Metric)=1005, Current Rating=550mA, DC Current=500mA, DC Resistance (DCR)=190mR, DC Resistance-Max=250mR, Frequency=100MHz, Manufacturer=Murata, Manufacturer Series=BLM15A, Max Operating Temperature=125°C, Min Operating Temperature=-55°C, Package Quantity=1, Supplier Part Number=81-BLM15AG121SN1D, Tolerance=25%, Case/Package=0402, Category="Ferrite Beads and Chips", Channels=1, Core Material=Ferrite, Depth=0.55mm, ESR=190mR, Height=0.5mm, Impedance=120R, Lead Free="Lead Free", Length=1mm, Manufacturer Part Number=BLM15AG121SN1D, Material=Steel,Ferrite, Max Current Rating=550mA, Max DC Current=500mA, Military Standard=Not, Number of Circuits=1, Number of Lines=1, Packaging="Tape and Reel", Pins=2, Pricing="1=0.1, 10=0.043, 50=0.034, 100=0.031, 1000=0.021, 10000=0.013 (USD)", Radiation Hardening=No, Reach SVHC Compliant=No, RMS Current (Irms)=550mA, RoHS=Yes, RoHS Compliant=Yes, Series=BLM15AG_SN, Shielding=Unshielded, Stock=120691, Supplier=Mouser, Supplier 1=Mouser, Supplier 2=Digikey, Supplier 3=Digikey, Supplier Part Number 1=81-BLM15AG121SN1D, Supplier Part Number 2=490-1005-1-ND, Supplier Part Number 3=490-1005-6-ND, Terminal Finish=Tin, Termination=SMD/SMT, Test Frequency=100MHz, Width=0.5mm
L1: library part DFE201612E-2R2M=P2, "Inductor Power Shielded Wirewound 2.2uH 20% 1MHz Metal 1.8A 0.116Ohm DCR 0806 T/R", Current Rating=1.8A, Inductance Tolerance=20%, Manufacturer=Murata, Manufacturer Part Number=DFE201612E-2R2M=P2, Max Operating Temperature=125°C, Min Operating Temperature=-40°C, Saturation Current=2.4A, Supplier Part Number=81-DFE201612E-2R2MP2, Test Frequency=1MHz, Category="Fixed Inductors", ComponentLink1Description=http://www.farnell.com/datasheets/2339714.pdf?src-supplier=Farnell, ComponentLink1URL=http://www.farnell.com/datasheets/2339714.pdf?src-supplier=Farnell, ComponentLink2Description=https://search.murata.co.jp/Ceramy/image/img/P02/J(E)TE243A-0006.pdf?src-supplier=Digi-Key, ComponentLink2URL=https://search.murata.co.jp/Ceramy/image/img/P02/J(E)TE243A-0006.pdf?src-supplier=Digi-Key, ComponentLink3Description=http://www.farnell.com/datasheets/2339714.pdf?src-supplier=Newark, ComponentLink3URL=http://www.farnell.com/datasheets/2339714.pdf?src-supplier=Newark, ComponentLink4Description=https://datasheet.octopart.com/DFE201612E-2R2M%3DP2-Murata-datasheet-150582460.pdf?src-supplier=Arrow.cn, ComponentLink4URL=https://datasheet.octopart.com/DFE201612E-2R2M%3DP2-Murata-datasheet-150582460.pdf?src-supplier=Arrow.cn, ComponentLink5Description=https://search.murata.co.jp/Ceramy/image/img/P02/J(E)TE243A-0006.pdf?src-supplier=Digikey, ComponentLink5URL=https://search.murata.co.jp/Ceramy/image/img/P02/J(E)TE243A-0006.pdf?src-supplier=Digikey, ESR=116mR, Height=1.2mm, Packaging=13Packaging, Pricing="3000=0,0929 (USD)", RMS Current (Irms)=1.8A, RoHS=Yes, Stock=102000, Supplier=Mouser, Supplier 1=Mouser, Supplier 2=Digikey, Supplier 3=Digikey, Supplier Part Number 1=81-DFE201612E-2R2MP2, Supplier Part Number 2=490-DFE201612E-2R2M=P2CT-ND, Supplier Part Number 3=490-DFE201612E-2R2M=P2DKR-ND
L3: library part LQM18FN4R7M00D, "Inductor Power Chip Shielded Multi-Layer 4.7uH 20% 1MHz Ferrite 0.08A 0.78Ohm DCR 0603 T/R", Case Code (Imperial)=0603, Case Code (Metric)=1608, Current Rating=80mA, DC Resistance (DCR)=600mR, Manufacturer=Murata, Max Operating Temperature=125°C, Min Operating Temperature=-55°C, Package Quantity=1, Self Resonant Frequency=50MHz, Supplier Part Number=81-LQM18FN4R7M00D, Test Frequency=1MHz, Tolerance=20%, Case/Package=0603, Category="Fixed Inductors", ComponentLink1Description=https://datasheet.ciiva.com/30489/0900766b812560c4-30489024.pdf?src-supplier=Rs, ComponentLink1URL=https://datasheet.ciiva.com/30489/0900766b812560c4-30489024.pdf?src-supplier=Rs, ComponentLink2Description=https://datasheet.ciiva.com/1039/l0075s0097lqm18f-1039394.pdf?src-supplier=Digikey, ComponentLink2URL=https://datasheet.ciiva.com/1039/l0075s0097lqm18f-1039394.pdf?src-supplier=Digikey, ComponentLink3Description=https://datasheet.ciiva.com/1039/l0075s0097lqm18f-1039393.pdf?src-supplier=Digikey, ComponentLink3URL=https://datasheet.ciiva.com/1039/l0075s0097lqm18f-1039393.pdf?src-supplier=Digikey, ComponentLink4Description=https://datasheet.ciiva.com/1039/l0075s0097lqm18f-1039395.pdf?src-supplier=Digikey, ComponentLink4URL=https://datasheet.ciiva.com/1039/l0075s0097lqm18f-1039395.pdf?src-supplier=Digikey, ComponentLink5Description=https://datasheet.ciiva.com/3082/l0075s0097lqm18f-3082197.pdf?src-supplier=Avnet, ComponentLink5URL=https://datasheet.ciiva.com/3082/l0075s0097lqm18f-3082197.pdf?src-supplier=Avnet, ComponentLink6Description=https://datasheet.ciiva.com/16390/l0075s0097lqm18f-16390346.pdf?src-supplier=Future+Electronics, ComponentLink6URL=https://datasheet.ciiva.com/16390/l0075s0097lqm18f-16390346.pdf?src-supplier=Future+Electronics, Core Material=Ferrite, DC Current=80mA, Depth=0.9mm, Height=0.8mm, Height - Seated (Max)=0.035inch, Lead Free="Lead Free", Length=1.6mm, Manufacturer Part Number=LQM18FN4R7M00D, Max Current Rating=80mA, Max DC Current=80mA, Military Standard=Not, Mounting Technology="Surface Mount", Packaging="Tape and Reel", Pricing="1=0.13, 10=0.11, 50=0.11, 100=0.091, 1000=0.075, 10000=0.06 (USD)", RoHS=Yes, RoHS Compliant=Yes, Saturation Current=80mA, Series=LQM18F, Shielding=Shielded, Stock=677, Supplier=Mouser, Supplier 1=Mouser, Supplier 2=Digikey, Supplier 3=Digikey, Supplier Part Number 1=81-LQM18FN4R7M00D, Supplier Part Number 2=490-4024-1-ND, Supplier Part Number 3=490-4024-6-ND, Termination=SMD/SMT, Weight=7.1E-05oz, Width=0.031inch
L4: library part LQG15WH2N7B02D, "Inductor Chip 2.7nH 0.1nH Tolerance 2-Pin 0402 Paper T/R", Manufacturer=Murata, Supplier Part Number=81-LQG15WH2N7B02D, Category="Fixed Inductors", Manufacturer Part Number=LQG15WH2N7B02D, Pricing="1=0.2, 10=0.161, 50=0.141, 100=0.133, 1000=0.109, 10000=0.088 (USD)", RoHS=Yes, Stock=6000, Supplier=Mouser, Supplier 1=Mouser, Supplier 2=Digikey, Supplier 3=Digikey, Supplier Part Number 1=81-LQG15WH2N7B02D, Supplier Part Number 2=490-LQG15WH2N7B02DDKR-ND, Supplier Part Number 3=490-LQG15WH2N7B02DCT-ND
L5 L6: library part LQG15WH3N5B02D, "Inductor Chip 3.5nH 0.1nH Tolerance 2-Pin 0402 Paper T/R", Manufacturer=Murata, Supplier Part Number=81-LQG15WH3N5B02D, Category="Fixed Inductors", Manufacturer Part Number=LQG15WH3N5B02D, Pricing="1=0.24, 10=0.187, 50=0.187, 100=0.146, 1000=0.113, 10000=0.09 (USD)", RoHS=Yes, Stock=9594, Supplier=Mouser, Supplier 1=Mouser, Supplier 2=Farnell, Supplier 3=Farnell, Supplier Part Number 1=81-LQG15WH3N5B02D, Supplier Part Number 2=3639288, Supplier Part Number 3=3639288RL
LED1: "LED Low-Power Tri-Color Blue/Green/Red 465nm/518nm/632nm 2.7V/2.75V/1.95V 4-Pin SMD T/R", Case Code (Imperial)=0404, Case Code (Metric)=1010, Color=Blue,Green,Red, Forward Current=2mA, Forward Voltage=2.73V, Lens Color=Colorless, Manufacturer=Lumex, Max Operating Temperature=85°C, Min Operating Temperature=-40°C, Package Quantity=2000, Power Rating=30mW, Reverse Voltage=5V, Supplier Part Number=696-LX0404SIUPGUSB, Case/Package=0404, Category=LEDs, ComponentLink1Description=https://datasheet.ciiva.com/1246/1423960-1246392.pdf?src-supplier=Element14, ComponentLink1URL=https://datasheet.ciiva.com/1246/1423960-1246392.pdf?src-supplier=Element14, ComponentLink2Description=https://datasheet.ciiva.com/1333/lumex-quasarbrite-0404smdrgb-productbrochure-1333009.pdf?src-supplier=Newark, ComponentLink2URL=https://datasheet.ciiva.com/1333/lumex-quasarbrite-0404smdrgb-productbrochure-1333009.pdf?src-supplier=Newark, ComponentLink3Description=https://datasheet.ciiva.com/2118/sml-lx0404siupgusb-2118652.pdf?src-supplier=Digikey, ComponentLink3URL=https://datasheet.ciiva.com/2118/sml-lx0404siupgusb-2118652.pdf?src-supplier=Digikey, ComponentLink4Description=https://datasheet.ciiva.com/4689/sml-lx0404siupgusb-202559-4689572.pdf?src-supplier=Mouser, ComponentLink4URL=https://datasheet.ciiva.com/4689/sml-lx0404siupgusb-202559-4689572.pdf?src-supplier=Mouser, ComponentLink5Description=https://datasheet.ciiva.com/16199/sml-lx0404siupgusb-16199820.pdf?src-supplier=Future+Electronics, ComponentLink5URL=https://datasheet.ciiva.com/16199/sml-lx0404siupgusb-16199820.pdf?src-supplier=Future+Electronics, ComponentLink6Description=https://datasheet.ciiva.com/1246/1484526-1246779.pdf?src-supplier=Element14, ComponentLink6URL=https://datasheet.ciiva.com/1246/1484526-1246779.pdf?src-supplier=Element14, ComponentLink7Description=https://datasheet.ciiva.com/2118/sml-lx0404siupgusb-2118653.pdf?src-supplier=Digikey, ComponentLink7URL=https://datasheet.ciiva.com/2118/sml-lx0404siupgusb-2118653.pdf?src-supplier=Digikey, ComponentLink8Description=https://datasheet.ciiva.com/2118/sml-lx0404siupgusb-2118654.pdf?src-supplier=Digikey, ComponentLink8URL=https://datasheet.ciiva.com/2118/sml-lx0404siupgusb-2118654.pdf?src-supplier=Digikey, ComponentLink9Description=https://datasheet.ciiva.com/14604/70127422-14604949.pdf?src-supplier=Allied+Electronics, ComponentLink9URL=https://datasheet.ciiva.com/14604/70127422-14604949.pdf?src-supplier=Allied+Electronics, Height=0.3mm, Lead Free="Lead Free", Length=1mm, Lens Style=Square,Clear,Rectangular, Lens Transparency=Clear, Luminous Intensity=20mcd, Manufacturer Part Number=SML-LX0404SIUPGUSB, Moisture Sensitivity Level=4, Mounting Technology="Surface Mount", Number of LEDs=3, Packaging="Tape and Reel", Pricing="1=0.94, 10=0.633, 50=0.633, 100=0.518, 1000=0.444, 10000=0.371 (USD)", Reach SVHC Compliant=No, RoHS=Yes, RoHS Compliant=Yes, Series=-, Stock=113976, Supplier=Mouser, Test Current=2mA, Viewing Angle=120°, Wavelength=465nm, Width=1mm
P1: "RM-1238-B02-41 by www.xtpogopin.com", Manufacturer=XTPogoPin, Manufacturer Part Number=RM-1238-B02-41
P2: "Conn FFC/FPC Connector SKT 11 POS 0.3mm Solder RA SMD Easy-On™ T/R", Manufacturer=Molex, Supplier Part Number=538-504754-1100, Checked=FALSE, ComponentLink1Description=https://datasheet.octopart.com/504754-1100-Molex-datasheet-169278456.pdf?src-supplier=Farnell, ComponentLink1URL=https://datasheet.octopart.com/504754-1100-Molex-datasheet-169278456.pdf?src-supplier=Farnell, ComponentLink2Description=http://datasheet.octopart.com/5047541100-Molex-datasheet-38188796.pdf?src-supplier=Onlinecomponents.com, ComponentLink2URL=http://datasheet.octopart.com/5047541100-Molex-datasheet-38188796.pdf?src-supplier=Onlinecomponents.com, ComponentLink3Description=http://datasheet.octopart.com/5047541100-Molex-datasheet-38188796.pdf?src-supplier=Verical, ComponentLink3URL=http://datasheet.octopart.com/5047541100-Molex-datasheet-38188796.pdf?src-supplier=Verical, ComponentLink4Description=http://datasheet.octopart.com/5047541100-Molex-datasheet-38188796.pdf?src-supplier=Avnet, ComponentLink4URL=http://datasheet.octopart.com/5047541100-Molex-datasheet-38188796.pdf?src-supplier=Avnet, ComponentLink5Description=http://datasheet.octopart.com/5047541100-Molex-datasheet-38188796.pdf?src-supplier=TTI, ComponentLink5URL=http://datasheet.octopart.com/5047541100-Molex-datasheet-38188796.pdf?src-supplier=TTI, ComponentLink6Description=http://datasheet.octopart.com/5047541100-Molex-datasheet-38188796.pdf?src-supplier=Electro+Sonic, ComponentLink6URL=http://datasheet.octopart.com/5047541100-Molex-datasheet-38188796.pdf?src-supplier=Electro+Sonic, ComponentLink7Description=https://datasheet.octopart.com/504754-1100-Molex-datasheet-154754160.pdf?src-supplier=Master+Electronics, ComponentLink7URL=https://datasheet.octopart.com/504754-1100-Molex-datasheet-154754160.pdf?src-supplier=Master+Electronics, Manufacturer Part Number=504754-1100, Pricing="1=0.77, 10=0.628, 50=0.544, 100=0.512, 1000=0.426, 10000=0.355 (USD)", RoHS=No, Stock=6459, Supplier=Mouser, Supplier 1=Mouser, Supplier Part Number 1=538-504754-1100
P3: "FFC/FPC Connector, Surface Mount, Right-Angle, Non-ZIF, Dual Contact Style", Manufacturer=Molex, Supplier Part Number=900-0512811098CT-ND, Supplier Part Number 1=538-51281-1098, ComponentLink1Description=https://datasheet.octopart.com/51281-1098-Molex-datasheet-165827616.pdf?src-supplier=Farnell, ComponentLink1URL=https://datasheet.octopart.com/51281-1098-Molex-datasheet-165827616.pdf?src-supplier=Farnell, Manufacturer Part Number=51281-1098, Pricing="1=0.7, 10=0.594, 25=0.5568, 50=0.53, 100=0.5047, 250=0.47304, 500=0.45042, 1000=0.42891 (USD)", RoHS=No, Stock=2876, Supplier=Digikey, Supplier 1=Mouser, Supplier 2=Digikey, Supplier 3=Digikey, Supplier Part Number 2=900-0512811098CT-ND, Supplier Part Number 3=900-0512811098DKR-ND, System=Connector
R1 R3 R6 R7 R8 R9: library part ERJ-2RKF1004X, "RES SMD 1M OHM 1% 1/10W 0402", Manufacturer="Panasonic Electronic Components", Operating Temperature="-55°C ~ 155°C", Package / Case="0402 (1005 Metric)", Power (Watts)="0.1W, 1/10W", Resistance (Ohms)=1M, Supplier Device Package=0402, Supplier Part Number 1=P1.00MLDKR-ND, Temperature Coefficient=±100ppm/°C, Tolerance=±1%, Category=Resistors, ComponentLink1Description=https://industrial.panasonic.com/cdbs/www-data/pdf/RDA0000/AOA0000C283.pdf, ComponentLink1URL=https://industrial.panasonic.com/cdbs/www-data/pdf/RDA0000/AOA0000C283.pdf, Composition="Thick Film", Failure Rate=-, Features="Automotive AEC-Q200", Height - Seated (Max)="0.016\" (0.40mm)", Manufacturer Part Number=ERJ-2RKF1004X, Number of Terminations=2, Packaging=Digi-Reel®, Part Status=Active, Pricing 1="1=0.1, 10=0.025, 25=0.018, 50=0.0136, 100=0.01, 250=0.00764, 500=0.00612, 1000=0.00451, 5000=0.00323 (USD)", RoHS="RoHS Compliant", Size / Dimension="0.039\" L x 0.020\" W (1.00mm x 0.50mm)", Stock 1=1590446, Supplier 1=Digi-Key